# Altium PCB schematik_rangkaian.PcbDoc
Units mil, origin at the board's own origin, x right, y up, seen from the top; angles counter-clockwise.
Board outline 1505 x 685 mil, 2 copper layers (Top Layer, Bottom Layer); 15 components, 8 nets, 38 pads, 2 vias.
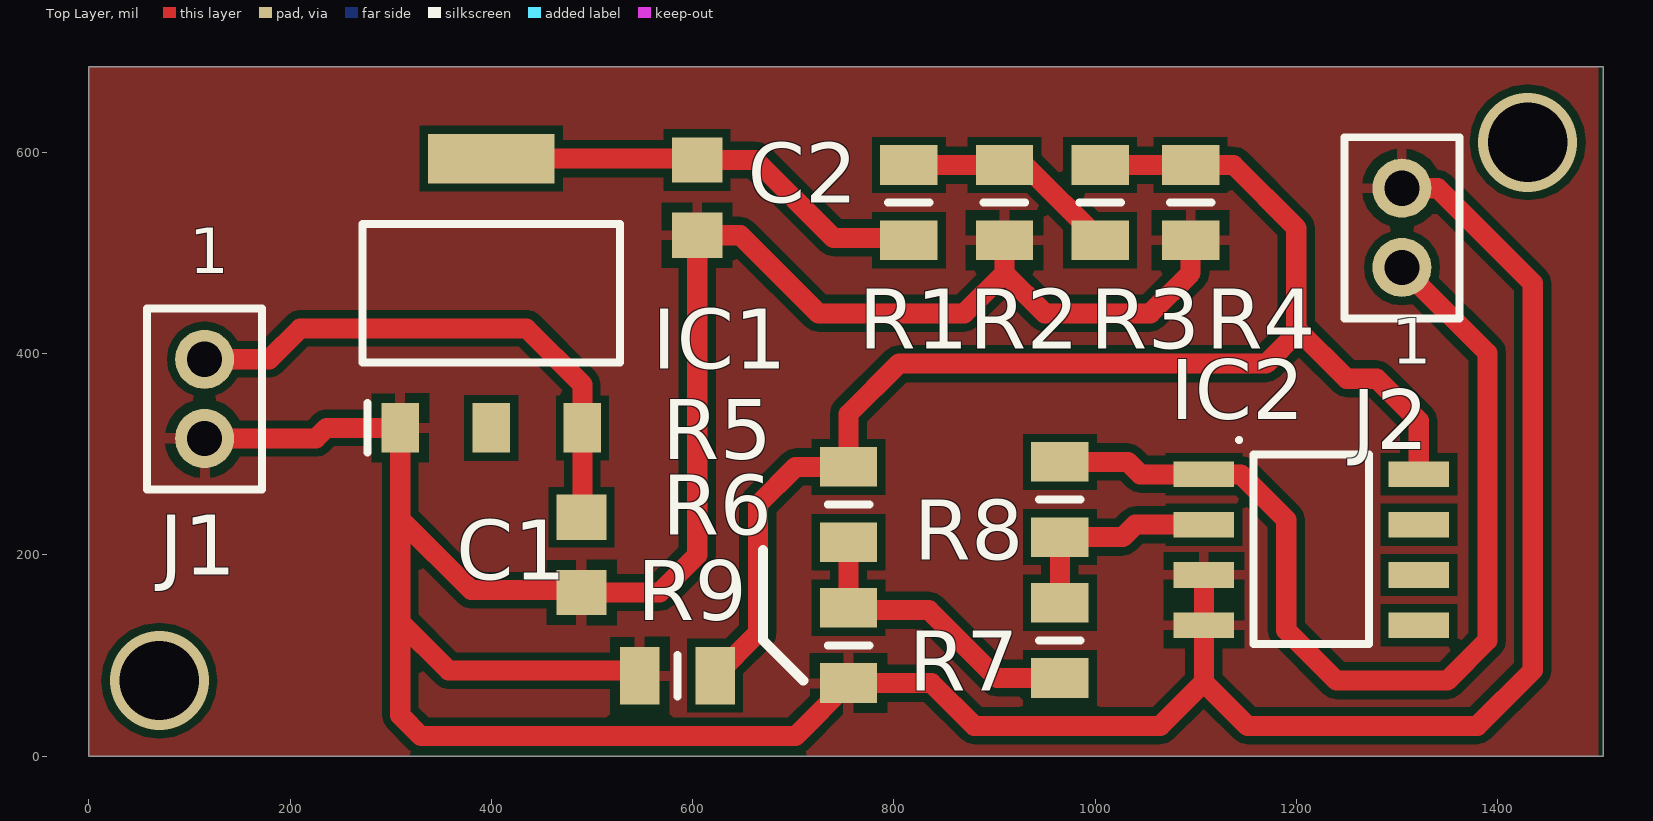
[diagram p0: Top Layer view]
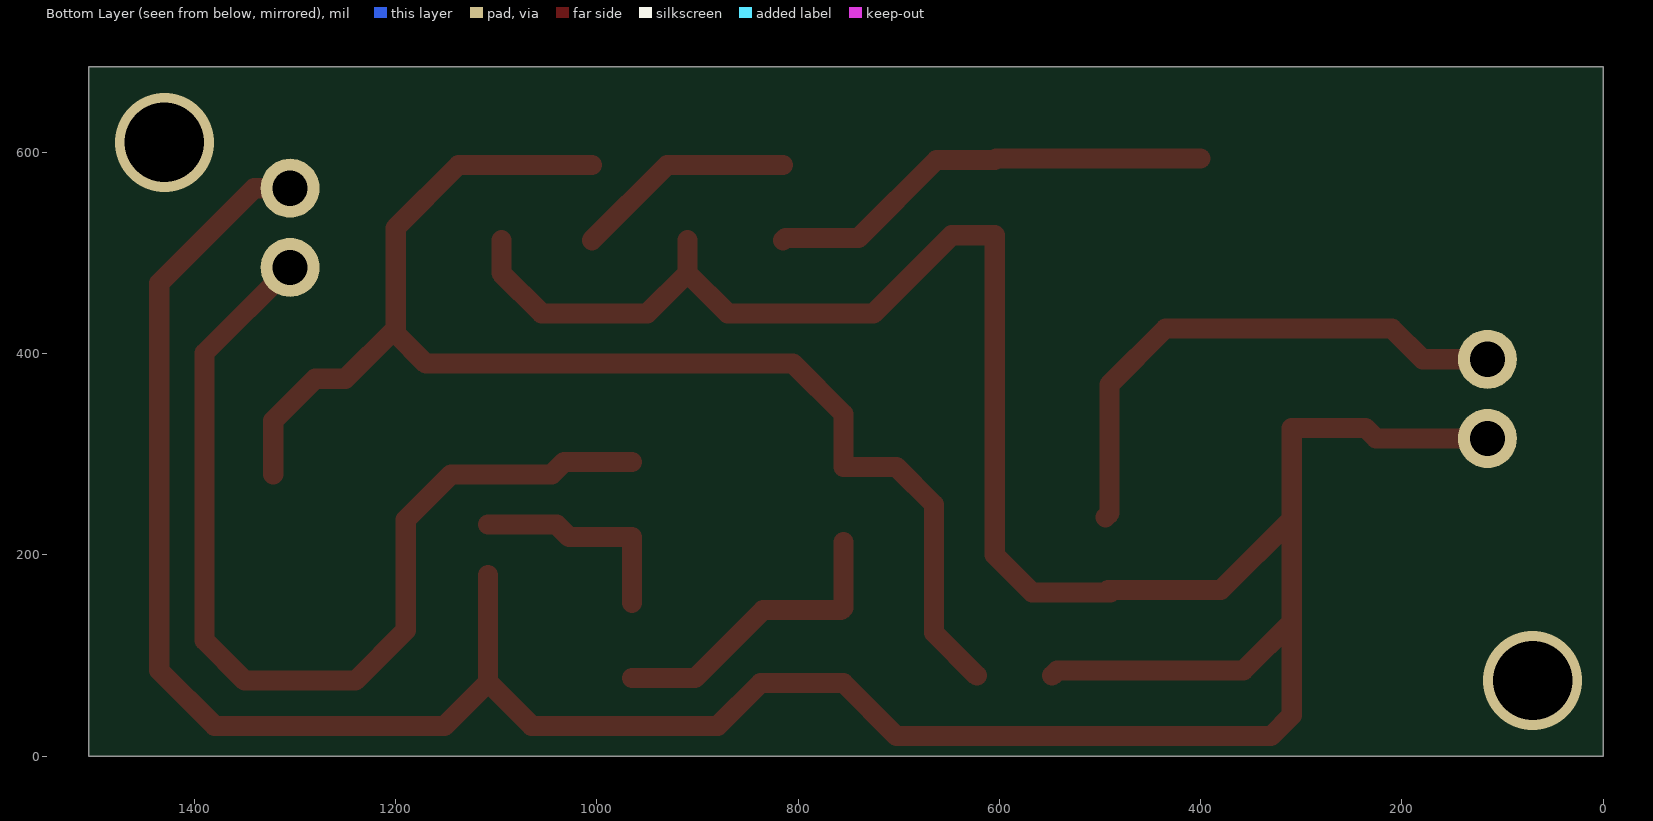
[diagram p1: Bottom Layer view, seen from below]
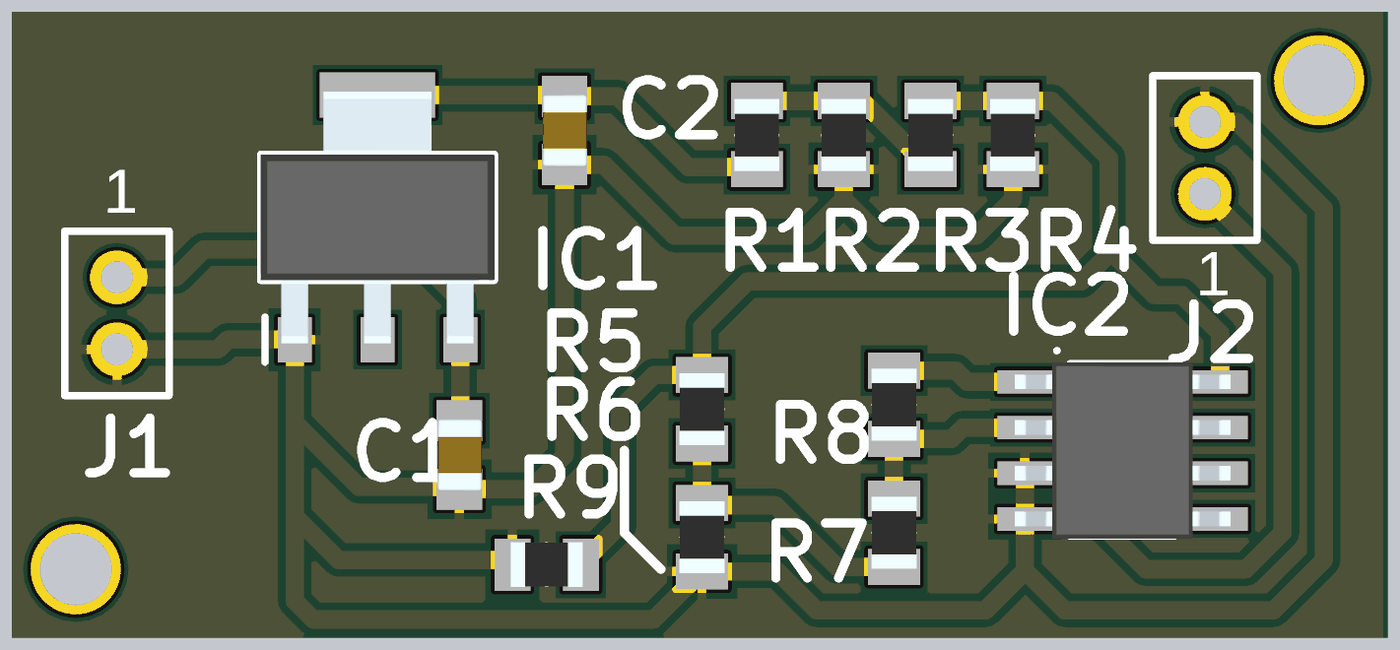
[diagram p2: 3D render of the assembled board from above, using the file's embedded part models]

## Layer stack, top to bottom
Top Solder: solder mask 0.4, Solder Resist, Dk 3.5
Top Layer: signal copper 1.4
Dielectric 1: dielectric 12.6, FR-4, Dk 4.8
Bottom Layer: signal copper 1.4
Bottom Solder: solder mask 0.4, Solder Resist, Dk 3.5

## Board outline
0,0 1505,0 1505,685 0,685

## Design rules (kind name [scope] priority, off if disabled: settings)
Clearance [All] p1: gap=8 ignorepadtopadclearanceinfootprint=FALSE
PolygonConnect [All] p1: connectstyle=Relief reliefconductorwidth=10 reliefentries=4 polygonreliefangle="90 Angle" airgapwidth=10
RoomDefinition Schematik_rangkaian [InComponentClass('Schematik_rangkaian')] p1: confinementstyle=ConfineIn formatcopy=TRUE lockcomponents=FALSE outline 0,0 1510,0 1510,685 0,685
RoutingVias [All] p1: holewidth=28 width=50 viastyle="Through Hole" minholewidth=28 minwidth=50 maxholewidth=28 maxwidth=50
SolderMaskExpansion [All] p1: expansion=4
Width [All] p1: maxlimit=50 minlimit=8 preferedwidth=10
30 further rules are at their usual default settings.

## Components (designator, comment, footprint, x,y, rotation, side; value= is the part's Value field where it differs from the comment)
C1 "0.01uF" 0805_CAP_STD 490,200 r90 top
C2 "0.01uF" 0805_CAP_STD 605,555 r90 top
IC1 "NCP1117ST33T3G" SOT230P700X180-4N 400,460 r90 top
IC2 "LM358DR" SOIC127P600X175-8N 1215,205 r0 top
J1 "header" SAMTEC-TMM-101-05-X-D 115,355 r180 top
J2 "header" SAMTEC-TMM-101-05-X-D 1305,525 r0 top
R1 "10k" RESC2012X65N 815,550 r90 top
R2 "200R" RESC2012X65N 910,550 r270 top
R3 "100R" RESC2012X65N 1005,550 r90 top
R4 "100k" RESC2012X65N 1095,550 r270 top
R5 "100k" RESC2012X65N 755,250 r270 top
R6 "100R" RESC2012X65N 755,110 r270 top
R7 "50k" RESC2012X65N 965,115 r90 top
R8 "100k" RESC2012X65N 965,255 r90 top
R9 "100k" RESC2012X65N 585,80 r0 top

## Footprints (in the part's own frame and the unit in brackets; to place one, negate y for a bottom-side part, rotate by r counter-clockwise, add the part's x,y. Pads: shape width x height; smd on the part's side, far side on the other; paste and mask are expansions set on the pad)
0805_CAP_STD [mm] "0805_CAPC2012X94N"
  rect 1.14x1.27 smd: 1(-0.95,0.01) 2(0.95,0.01)
  body extent -1,-0.63 1,0.63, height 0.94
RESC2012X65N [mm]
  rect 1x1.45 smd: 1(-0.95,0) 2(0.95,0)
  silkscreen extent 0,-0.53 0,0.53, body extent -1,-0.63 1,0.63, height 0.65
SAMTEC-TMM-101-05-X-D [mm]
  round 1.49 hole 0.89: 1(0,-1) 2(0,1)
  silkscreen extent -1.45,-2.29 1.45,2.29
SOIC127P600X175-8N [mm]
  rect 1.525x0.65 smd: 1(-2.712,1.905) 2(-2.712,0.635) 3(-2.712,-0.635) 4(-2.712,-1.905) 5(2.712,-1.905) 6(2.712,-0.635) 7(2.712,0.635) 8(2.712,1.905)
  silkscreen extent -1.83,-2.38 1.45,2.77, body extent -3,-2.45 3,2.45, height 1.75
SOT230P700X180-4N [mm]
  rect 1.25x0.95 smd: 1(-3.4,2.3) 2(-3.4,0) 3(-3.4,-2.3)
  rect 1.25x3.2 smd: 4(3.4,0)
  silkscreen extent -4.03,-3.25 1.75,3.25, body extent -3.5,-3.25 3.5,3.25, height 1.8

## Part data
C1 C2: library part 08055A130JAQ2A, "Capacitor", Manufacturer_Name=AVX, Mouser Part Number=581-08055A130JAQ2A, Datasheet Link=https://componentsearchengine.com/Datasheets/1/06031A100FAT2A.pdf, Height=0.94mm, Manufacturer_Part_Number=08055A130JAQ2A, Mouser Price/Stock=http://www.mouser.com/Search/ProductDetail.aspx?qs=bb%252b1MDm7h6LP6YczTxaOqA%3d%3d
IC1: "Integrated Circuit", Manufacturer_Name="ON Semiconductor", Mouser Part Number=863-NCP1117ST33T3G, RS Part Number=7857207P, Allied_Number=70340559, Allied Price/Stock=http://www.alliedelec.com/on-semiconductor-ncp1117st33t3g/70340559/, Datasheet Link=http://www.onsemi.com/pub/Collateral/NCP1117-D.PDF, Height=1.8mm, Manufacturer_Part_Number=NCP1117ST33T3G, Mouser Price/Stock=https://www.mouser.com/Search/Refine.aspx?Keyword=863-NCP1117ST33T3G, RS Price/Stock=http://uk.rs-online.com/web/p/products/7857207P
IC2: "Integrated Circuit", Manufacturer_Name="Texas Instruments", Mouser Part Number=595-LM358DR, RS Part Number=0527154, Datasheet Link=http://docs-emea.rs-online.com/webdocs/13f6/0900766b813f612f.pdf, Height=1.75mm, Manufacturer_Part_Number=LM358DR, Mouser Price/Stock=https://www.mouser.com/Search/Refine.aspx?Keyword=595-LM358DR, RS Price/Stock=http://uk.rs-online.com/web/p/products/0527154
J1 J2: library part SAMTEC-TMM-101-05-X-DJ
R1 R2 R3 R4 R5 R6 R7 R8 R9: library part CPF0805B100KE, "Resistor", Manufacturer_Name="TE Connectivity", Mouser Part Number=279-CPF0805B100KE, RS Part Number=6662673P, Allied_Number=70286772, Allied Price/Stock=https://www.alliedelec.com/te-connectivity-cpf0805b100ke/70286772/, Datasheet Link=http://docs-europe.electrocomponents.com/webdocs/13d1/0900766b813d116f.pdf, Height=0.65mm, Manufacturer_Part_Number=CPF0805B100KE, Mouser Price/Stock=https://www.mouser.com/Search/Refine.aspx?Keyword=279-CPF0805B100KE, RS Price/Stock=http://uk.rs-online.com/web/p/products/6662673P

## Via types
v1: diameter 98.43, hole 78.74, Top Layer to Bottom Layer, 2 vias

## Nets (pads, with @x,y where several pads share a name; then routed paths per layer and width w, separated by ;. In a path a pad name is that pad's centre, name@x,y a point inside that pad or via, vN(x,y) a via of type N, cw(c..) or ccw(c..) an arc to the next point about the centre after c; other vN are vias at no path point)
GND: C1.1 C2.1 IC1.1 IC2.3 IC2.4 J1.2 J2.2 R2.2 R4.2 R6.2 R9.1 | length 3938.5
  Top Layer w20: J1.2 225.63,315.63 236.14,326.14 IC1.1 309.45,235.55 ; C1.1 C1.1@494.61,162.6 ; R9.1 542.6,85 357.6,85 309.45,133.15 ; R2.2 910,480 ; R4.2 1095,480 1055,440 950,440 910,480 ; IC2.3 IC2.4 1108.23,73.23 ; J2.2 1340.63,564.37 1435,470 1435,85 1380,30 1151.46,30 1108.23,73.23 ; 309.45,133.15 309.45,40.55 330,20 702.4,20 R6.2 837.4,72.6 880,30 1065,30 1108.23,73.23 ; 309.45,133.15 309.45,235.55 ; 309.45,235.55 380,165 492.2,165 C1.1@494.61,162.6 ; C1.1@494.61,162.6 567.4,162.6 604.61,199.8 C2.1 647.4,517.6 725,440 870,440 910,480
NetC1_2: C1.2 IC1.3 J1.1 | length 545
  Top Layer w20: J1.1 179.37,394.37 210,425 435,425 490.55,369.45 IC1.3 490.55,241.46 C1.2@494.61,237.4
NetC2_2: C2.2 IC1.4 R1.1 | length 448.7
  Top Layer w20: IC1.4 603.15,593.86 C2.2 662.6,592.4 740,515 812.6,515 R1.1
NetIC2_1: IC2.1 J2.1 R8.2 | length 1001.9
  Top Layer w20: R8.2 1032.6,292.4 1045,280 IC2.1 1145,280 1190,235 1190,125 1240,75 1350,75 1390,115 1390,400.63 J2.1
NetIC2_2: IC2.2 R7.2 R8.1 | length 213.6
  Top Layer w20: R7.2 R8.1 1027.6,217.6 1040,230 IC2.2
NetR1_2: R1.2 R2.1 R3.1 | length 221
  Top Layer w20: R1.2 R2.1 930.2,587.4 R3.1
NetR5_2: R5.2 R6.1 R7.1 | length 304.1
  Top Layer w20: R5.2 R6.1 757.4,145 835,145 902.4,77.6 R7.1
VCC: IC2.8 R3.2 R4.1 R5.1 R9.2 | length 1362.7
  Top Layer w20: R9.2 665,122.6 665,250 702.4,287.4 R5.1 755,340 805,390 1170,390 1200,420 1200,425 ; R3.2 R4.1 1137.6,587.4 1200,525 1200,425 ; IC2.8 1321.77,333.23 1280,375 1250,375 1200,425
pads on no net: IC1.2 IC2.5 IC2.6 IC2.7
copper on no net:
  other v1: 70,75 1430,610

## Polygon pours and split planes (outlines as drawn)
GND on Top Layer "Top Layer-GND" (solid, pour order 0): 0,685 1500,685 1500,0 0,0

## Silkscreen, mask and mechanical layers (free items; w line width, h text height)
Top Overlay:
  lines w10: 670,205 670,115 710,75
Mechanical 1:
  the board outline again, w10

## Text inside footprints (layer, text, board x,y; h text height)
J1: Top Overlay "1" at 100,465 h77.5
J2: Top Overlay "1" at 1295,375 h77.5